# EAGLE board Display (EAGLE 6.3)
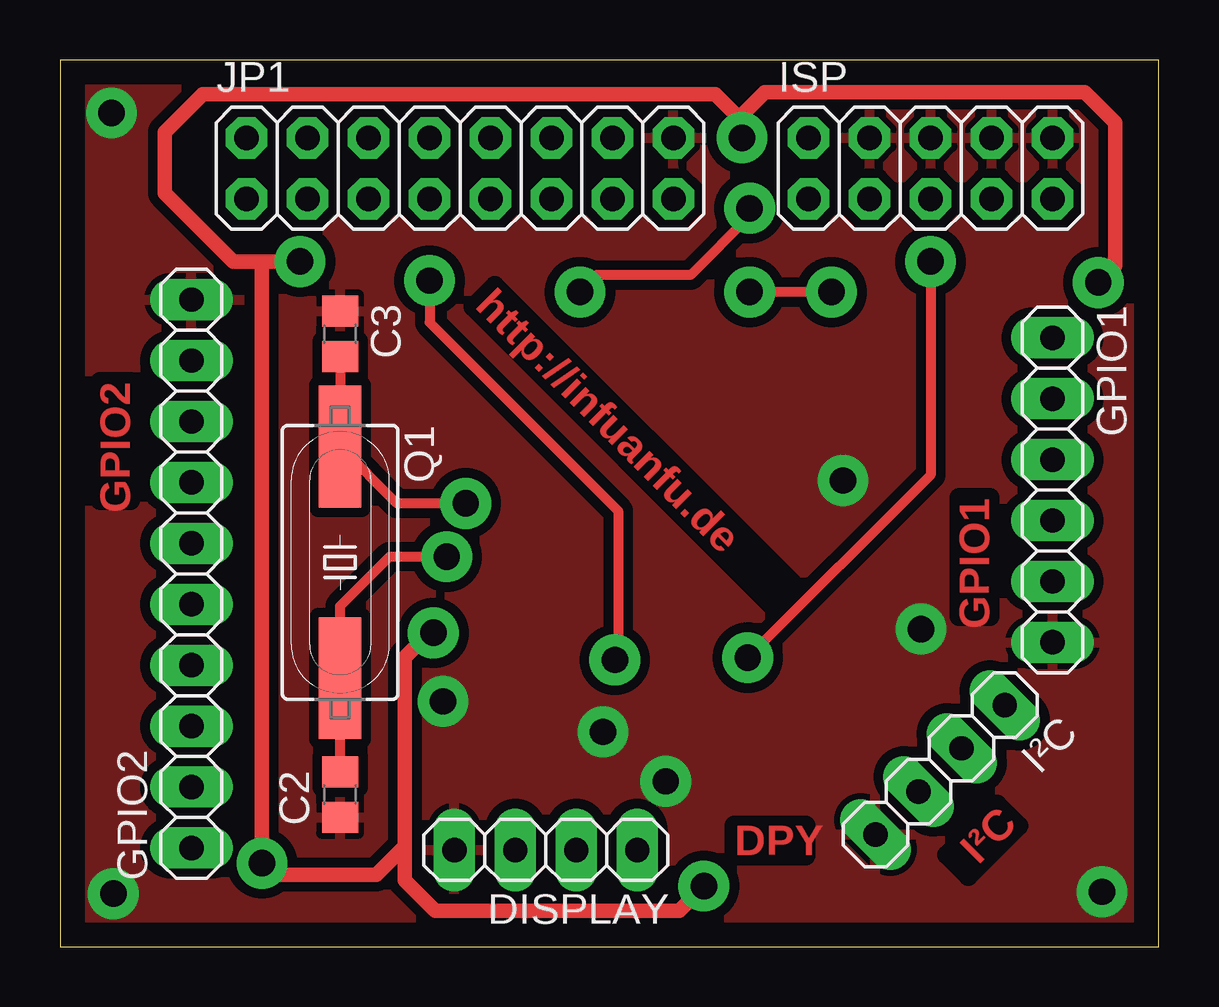
[diagram p0: board, top side]
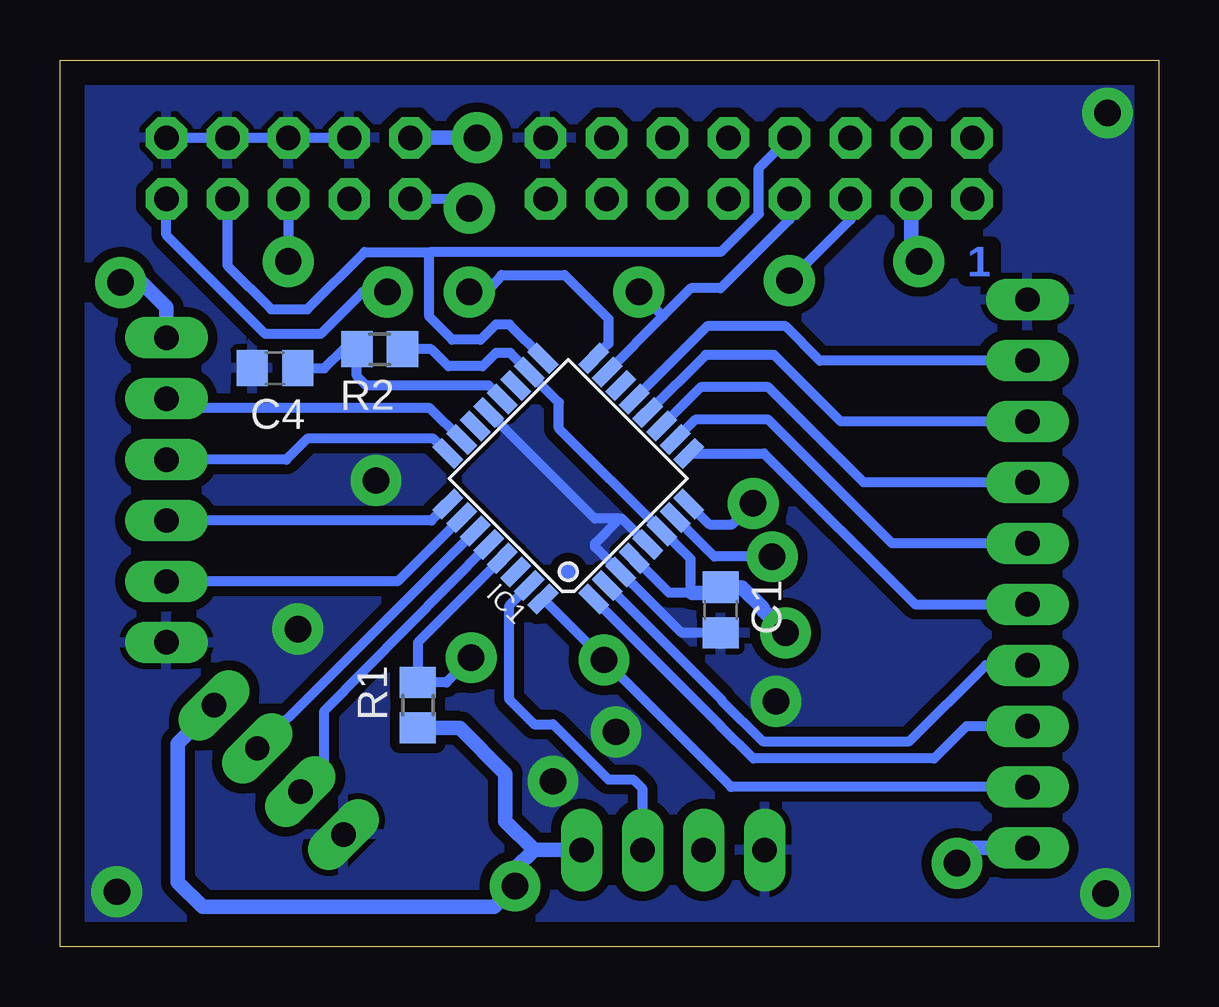
[diagram p1: board, bottom side, seen from below]

Size 45.79 x 36.98 mm. Coordinates in mm from the lower left corner, seen from the top.
Outline: 0,0 45.79,0 45.79,36.98 0,36.98 0,0
Copper layers (1*16): Top 0.035mm / dielectric 1.5mm / Bottom 0.035mm
Design rules "default *": minimum track width 10mil, minimum drill 24mil, track to track 8mil, track to pad 8mil, pad to pad 8mil, via to via 8mil, smd to smd 8mil, copper to edge 40mil, drill to drill 8mil, minimum pad ring 10mil, minimum via ring 8mil, stop-mask expansion 4mil, vias tented up to drill 0mil, thermal gap 10mil

## Footprints (pad centres in the part's own frame; a part is rotated, then mirrored left to right if it is on the bottom)
C0805 = smd 1.3 x 1.5: 1 -0.95,0; 2 0.95,0
1X04 = drill 1.016 long: 1 -3.81,0; 2 -1.27,0; 3 1.27,0; 4 3.81,0
1X06 = drill 1.016 long: 1 -6.35,0; 2 -3.81,0; 3 -1.27,0; 4 1.27,0; 5 3.81,0; 6 6.35,0
1X10 = drill 1.016 long: 1 -11.43,0; 2 -8.89,0; 3 -6.35,0; 4 -3.81,0; 5 -1.27,0; 6 1.27,0; 7 3.81,0; 8 6.35,0; 9 8.89,0; 10 11.43,0
TQFP32-08 = smd 1.27 x 0.559: 1 -4.293,2.8; 2 -4.293,2; 3 -4.293,1.2; 4 -4.293,0.4; 5 -4.293,-0.4; 6 -4.293,-1.2; 7 -4.293,-2; 8 -4.293,-2.8; 17 4.293,-2.8; 18 4.293,-2; 19 4.293,-1.2; 20 4.293,-0.4; 21 4.293,0.4; 22 4.293,1.2; 23 4.293,2; 24 4.293,2.8 | smd 0.559 x 1.27: 9 -2.8,-4.293; 10 -2,-4.293; 11 -1.2,-4.293; 12 -0.4,-4.293; 13 0.4,-4.293; 14 1.2,-4.293; 15 2,-4.293; 16 2.8,-4.293; 25 2.8,4.293; 26 2,4.293; 27 1.2,4.293; 28 0.4,4.293; 29 -0.4,4.293; 30 -1.2,4.293; 31 -2,4.293; 32 -2.8,4.293
2X05 = drill 1.016 octagon: 1 -5.08,-1.27; 2 -5.08,1.27; 3 -2.54,-1.27; 4 -2.54,1.27; 5 0,-1.27; 6 0,1.27; 7 2.54,-1.27; 8 2.54,1.27; 9 5.08,-1.27; 10 5.08,1.27
2X08 = drill 1.016 octagon: 1 -8.89,-1.27; 2 -8.89,1.27; 3 -6.35,-1.27; 4 -6.35,1.27; 5 -3.81,-1.27; 6 -3.81,1.27; 7 -1.27,-1.27; 8 -1.27,1.27; 9 1.27,-1.27; 10 1.27,1.27; 11 3.81,-1.27; 12 3.81,1.27; 13 6.35,-1.27; 14 6.35,1.27; 15 8.89,-1.27; 16 8.89,1.27
SM49 = smd 5.08 x 1.778: 1 -4.826,0; 2 4.826,0
R0805 = smd 1.3 x 1.5: 1 -0.95,0; 2 0.95,0

## Placement (x,y rotation side)
C1  100n  [C0805]  18.26,14.05 270 bottom
C2  22n  [C0805]  11.67,6.35 90 top
C3  22n  [C0805]  11.67,25.56 270 top
C4  [C0805]  36.83,24.13 180 bottom
DISPLAY  [1X04]  20.24,4.05 180 top
GPIO1  [1X06]  41.35,19.05 270 top
GPIO2  [1X10]  5.48,15.56 90 top
IC1  MEGA8-AI  [TQFP32-08]  24.61,19.53 135 bottom
ISP  [2X05]  36.27,32.46 0 top
I²C  [1X04]  36.67,7.38 225 top
JP1  [2X08]  16.67,32.46 0 top
Q1  [SM49]  11.67,16.03 270 top
R1  10k  [R0805]  30.88,10.08 90 bottom
R2  [R0805]  32.46,24.92 180 bottom

## Library data of the parts
C1-C4 R1 R2 = rcl
DISPLAY GPIO1 GPIO2 ISP I²C JP1 = pinhead
IC1 = atmel; MPN: ATMEGA8-16AU; OC_FARNELL: 9171371; OC_NEWARK: 73M8863
Q1 = crystal; OC_FARNELL: unknown; OC_NEWARK: unknown

## Nets
CENTERTAP: GPIO2.2 IC1.32 JP1.5
DISPLAY: DISPLAY.2 IC1.31
GND: C1.2 C2.1 C3.1 C4.2 DISPLAY.4 GPIO1.6 GPIO2.10 IC1.3 IC1.5 IC1.21 ISP.4 ISP.6 ISP.8 ISP.10 I²C.4 JP1.16
MISO: IC1.16 ISP.9
MOSI: IC1.15 ISP.1 JP1.7
N$1: C3.2 IC1.8 Q1.1
N$2: C2.2 IC1.7 Q1.2
N$3: IC1.27 I²C.2
N$4: IC1.28 I²C.3
N$5: GPIO1.5 IC1.26
N$6: GPIO1.4 IC1.25
N$7: GPIO1.3 IC1.24
N$8: GPIO1.2 IC1.23
N$9: GPIO2.9 IC1.13
N$10: GPIO2.8 IC1.12
N$11: GPIO2.7 IC1.11
N$12: GPIO2.6 IC1.10
N$13: GPIO2.5 IC1.9
N$14: GPIO2.4 IC1.2
N$15: GPIO2.3 IC1.1
N$16: C4.1 IC1.20 R2.2
RESET: IC1.29 ISP.5 R1.2
SCK: IC1.17 ISP.7 JP1.8
SS: IC1.14
VCC: C1.1 DISPLAY.1 GPIO1.1 GPIO2.1 IC1.4 IC1.6 IC1.18 ISP.2 I²C.1 JP1.3 R1.1 R2.1

## Tracks (layer width: path | path; a pad name or v marks a point on that pad's centre or on a via)
CENTERTAP  (via drill 1.1)
  Top 0.406: v15.4,27.78 15.4,26.04 23.26,18.18 23.26,12.11 v23.12,11.97
  Bottom 0.406: GPIO2.2 17.82,6.67 v23.12,11.97 IC1.32 | JP1.5 12.86,30.32 v15.4,27.78
DISPLAY
  Bottom 0.406: DISPLAY.2 21.51,6.59 21.91,6.98 22.94,6.98 25.24,9.29 26.03,9.29 27.07,10.32 27.07,14.24 IC1.31
GND  (via drill 1.1)
  Bottom 0.406: ISP.10 ISP.8 ISP.6 ISP.4 | C1.2 19.87,13.1 IC1.3 22.47,15.64 23.49,16.67 23.49,16.83 22.46,17.86 | IC1.21 23.5,17.86 22.46,17.86 | 22.46,17.86 22.37,17.86 IC1.5
  other vias: 2.22,2.22 2.14,34.77 35.88,13.26 43.42,2.3 15.95,10.24 25.24,6.91 22.62,8.97 32.62,19.45
  pour Top (isolate 0.406): -17.3,74.37 86.28,74.37 87.15,-27.78 -16.83,-27.78
  pour Bottom (isolate 0.406): -24.61,46.99 90.01,46.59 90.01,-11.51 -24.61,-11.11
MISO  (via drill 1.1)
  Top 0.406: v32.15,27.3 v28.73,27.3
  Bottom 0.406: IC1.16 22.94,25.15 22.94,26.19 24.76,28.02 27.38,28.02 28.02,27.3 v28.73,27.3 | v32.15,27.3 33.18,27.3 34.92,25.56 37.23,25.56 41.35,29.69 ISP.9
MOSI  (via drill 1.1)
  Top 0.406: v28.73,30.8 28.73,30.48 26.27,28.02 22.38,28.02 v21.67,27.3
  Bottom 0.406: 20.66,26.3 19.5,27.46 18.26,27.46 15.4,30.32 JP1.7 | 20.66,26.3 IC1.15 | ISP.1 29.13,31.19 v28.73,30.8 | v21.67,27.3 20.66,26.3
N$1  (via drill 1.1)
  Top 0.406: C3.2 Q1.1 14.03,18.49 v16.91,18.49
  Bottom 0.406: IC1.8 19.58,18.47 18.73,17.62 17.78,17.62 v16.91,18.49
N$2  (via drill 1.1)
  Top 0.406: C2.2 Q1.2 11.67,14.21 13.73,16.27 v16.11,16.27
  Bottom 0.406: v16.11,16.27 18.52,16.27 IC1.7
N$3
  Bottom 0.406: I²C.2 35,10.83 IC1.27
N$4
  Bottom 0.406: I²C.3 34.77,7.46 34.77,9.85 IC1.28
N$5
  Bottom 0.406: IC1.26 31.72,15.24 GPIO1.5
N$6
  Bottom 0.406: IC1.25 30.31,17.78 GPIO1.4
N$7
  Bottom 0.406: IC1.24 30.23,21.19 35.48,21.19 36.35,20.32 GPIO1.3
N$8
  Bottom 0.406: IC1.23 30.37,22.46 40.88,22.46 GPIO1.2
N$9
  Bottom 0.406: GPIO2.9 14.13,24.45 15.56,25.88 18.82,25.88 IC1.13
N$10
  Bottom 0.406: GPIO2.8 13.26,21.91 16.03,24.69 18.88,24.69 IC1.12
N$11
  Bottom 0.406: GPIO2.7 12.3,19.37 16.27,23.34 19.1,23.34 IC1.11
N$12
  Bottom 0.406: GPIO2.6 11.11,16.83 16.27,21.99 19.32,21.99 IC1.10
N$13
  Bottom 0.406: IC1.9 16.45,20.58 10.16,14.29 GPIO2.5
N$14
  Bottom 0.406: IC1.2 18.23,10.32 18.23,10.29 16.51,8.57 10.4,8.57 7.22,11.75 GPIO2.4
N$15
  Bottom 0.406: IC1.1 18.29,9.25 18.25,9.21 16.9,7.86 9.37,7.86 8.02,9.21 GPIO2.3
N$16
  Bottom 0.406: IC1.20 27.93,23.42 33.02,23.42 33.41,23.81 R2.2 33.97,24.92 34.77,24.13 C4.1
RESET  (via drill 1.1)
  Top 0.406: v36.27,28.58 36.27,19.69 v28.65,12.06
  Bottom 0.406: ISP.5 v36.27,28.58 | IC1.29 30.88,12.69 R1.2 29.69,11.03 v28.65,12.06
SCK
  Bottom 0.406: 25.98,24.82 IC1.17 27.07,25.96 27.62,25.96 28.26,25.32 29.45,25.32 30.4,26.27 30.4,28.89 30.32,28.97 | JP1.8 16.67,32.46 16.67,30.56 18.26,28.97 30.32,28.97 | ISP.7 38.81,28.42 36.99,26.59 35.48,26.59 33.1,28.97 30.32,28.97
VCC  (via drill 1.1)
  Top 0.61: 28.42,34.45 28.42,34.69 29.37,35.64 42.7,35.64 43.97,34.37 43.97,28.42 v43.26,27.7 | v28.42,33.73 28.42,34.45 | 28.42,34.45 27.3,35.56 5.95,35.56 4.37,33.97 4.37,31.43 5.56,30.24 5.64,30.16 7.22,28.58 8.41,28.58 | v10,28.58 8.41,28.58 | v15.56,13.1 15.4,13.1 14.37,12.06 14.37,4.21 | 14.37,4.21 13.18,3.02 8.89,3.02 v8.41,3.49 8.41,28.58 | 14.37,4.21 14.37,2.78 15.64,1.51 25.8,1.51 v26.83,2.54
  Bottom 0.406: IC1.4 20.41,14.76 19.45,14.76 19.53,14.84 19.53,16.19 20.67,17.34 IC1.6 25,21.62 25,22.7 26.23,23.92 IC1.18 27.02,24.77 27.62,24.77 28.18,24.21 29.61,24.21 30.32,24.92 R2.1
  Bottom 0.61: ISP.2 v28.42,33.73 | v43.26,27.7 42.39,27.7 41.35,26.67 GPIO1.1 | JP1.3 10.32,28.89 v10,28.58 | v8.41,3.49 7.78,4.13 GPIO2.1 | DISPLAY.1 26.03,4.05 | 26.03,4.05 27.23,5.24 27.23,7.22 29.13,9.13 R1.1 | 26.03,4.05 26.83,3.25 v26.83,2.54 27.7,1.67 39.85,1.67 40.88,2.7 40.88,8.49 39.37,10.01 I²C.1 | 19.45,14.76 18.49,14.76 C1.1 17.38,15 16.51,14.13 16.51,14.05 v15.56,13.1
(copper drawn outside any net)
  shapes: Bottom circle x1

## Text on the board
Top: http://infuanfu.de | GPIO2 | GPIO1 | I²C | DPY
Bottom: 1